# EAGLE board MP2636-Single-Cell-BMS (EAGLE 9.6.2)

Size 75.93 x 70.2 mm. Coordinates in mm from the lower left corner, seen from the top.
Outline: 0,0.19 75.92,0 75.92,70.01 0,70.2 0,0.19
Copper layers (1*16): Top 0.035mm / dielectric 1.5mm / Bottom 0.035mm
Design rules "default": minimum track width 6mil, minimum drill 0.35mm, track to track 6mil, track to pad 6mil, pad to pad 6mil, via to via 6mil, smd to smd 6mil, copper to edge 40mil, drill to drill 6mil, minimum pad ring 10mil, minimum via ring 8mil, stop-mask expansion 4mil, vias tented up to drill 0mil, thermal gap 10mil

## Footprints (pad centres in the part's own frame; a part is rotated, then mirrored left to right if it is on the bottom)
CAPC2012X110 = smd 1.165 x 1.465: 1 -0.875,0; 2 0.875,0
1X01 = drill 1.016 octagon: 1 0,0
04C = drill 0.813 pad 1.905 octagon: 1 -1.905,0; 2 1.905,0; 3 5.715,0
IND_LQH5BPN2R2NT0L = smd 1.85 x 4.1: 1 -1.825,0; 2 1.825,0
CHIP-LED0805 = smd 1.2 x 1.2: A 0,-1.05; C 0,1.05
RESC2012X65 = smd 1.031 x 1.42: 1 -0.919,0; 2 0.919,0
IC_MP2636GR-P = smd 1.1 x 0.2: 1 -2.05,1.4; 2 -2.05,1; 3 -2.05,0.6; 4 -2.05,0.2; 5 -2.05,-0.2; 6 -2.05,-0.6; 7 -2.05,-1; 8 -2.05,-1.4; 15 2.05,-1.4; 16 2.05,-1; 17 2.05,-0.6; 18 2.05,-0.2; 19 2.05,0.2; 20 2.05,0.6; 21 2.05,1; 22 2.05,1.4 | smd 0.2 x 1.1: 9 -1,-2.05; 10 -0.6,-2.05; 11 -0.2,-2.05; 12 0.2,-2.05; 13 0.6,-2.05; 14 1,-2.05; 23 1,2.05; 24 0.6,2.05; 25 0.2,2.05; 26 -0.2,2.05; 27 -0.6,2.05; 28 -1,2.05 | smd 1.8 x 0.3: 29 0,0.6; 30 0,0

## Placement (x,y rotation side)
C1  1uf  [CAPC2012X110]  33.33,33.56 0 top
C2  1uf  [CAPC2012X110]  33.22,35.79 0 top
C3  22uf  [CAPC2012X110]  36.63,43.05 90 top
C4  100nf  [CAPC2012X110]  33.4,31.33 180 top
C5  1uf  [CAPC2012X110]  45.69,31.82 180 top
C6  1uf  [CAPC2012X110]  45.65,34.13 180 top
C7  22uf  [CAPC2012X110]  34.43,40.57 180 top
C8  [CAPC2012X110]  40.83,15.37 180 top
C9  NC  [CAPC2012X110]  15.37,53.55 0 top
CBATT  22uf  [CAPC2012X110]  55.18,44.51 90 top
CIN  22uf  [CAPC2012X110]  30.23,34.66 270 top
CSYS  22uf  [CAPC2012X110]  34.41,38.25 180 top
CTMR  100nf  [CAPC2012X110]  34.77,23.9 270 top
F  SYS  [1X01]  24.13,37.02 0 top
JP1  [04C]  37.17,57.09 90 top
JP2  [04C]  41.28,57.13 90 top
JP3  [04C]  55.94,17.42 180 top
JP4  VIN  [1X01]  24.13,31.94 0 top
JP5  [04C]  52.07,12.89 0 top
JP6  PGND  [1X01]  68.08,50.39 0 top
JP7  PWIN  [1X01]  68.57,31.36 0 top
JP8  VCC  [1X01]  25.4,9.08 0 top
JP9  VIN  [1X01]  10.16,33.21 0 top
JP10  AGND  [1X01]  40.64,9.08 0 top
JP11  SYS  [1X01]  10.16,48.45 0 top
JP12  IB  [1X01]  10.54,56.6 0 top
JP13  BATT  [1X01]  41.3,45.87 0 top
JP14  BATT  [1X01]  68.08,56.74 0 top
JP15  NTC  [1X01]  30.48,9.08 0 top
JP16  SW  [1X01]  68.34,37.76 0 top
JP17  PGND  [1X01]  10.16,40.83 0 top
JP18  SYS  [1X01]  35.56,9.08 0 top
L1  1.5uH  [IND_LQH5BPN2R2NT0L]  47.39,39.54 90 top
LED1  [CHIP-LED0805]  38.09,14.66 0 top
LED2  [CHIP-LED0805]  53.64,57.67 180 top
LED3  [CHIP-LED0805]  51.24,57.73 180 top
R1  31.6K  [RESC2012X65]  40.79,17.61 180 top
R2  10K  [RESC2012X65]  40.79,19.89 0 top
R3  23.7K 1%  [RESC2012X65]  30.07,22.35 270 top
R4  5.1K  [RESC2012X65]  31.73,25.92 0 top
R5  10K  [RESC2012X65]  37.17,66.12 270 top
R6  10K  [RESC2012X65]  41.24,66.15 270 top
R7  10K  [RESC2012X65]  48.06,15 90 top
R9  2K  [RESC2012X65]  40.75,13.05 0 top
R10  2K  [RESC2012X65]  53.61,61.43 90 top
R11  2K  [RESC2012X65]  51.22,61.45 90 top
R12  1K  [RESC2012X65]  11.73,53.59 0 top
R21  0  [RESC2012X65]  64.99,17.4 180 top
RH  15K 1%  [RESC2012X65]  32.28,22.35 270 top
RILIM  13.3K  [RESC2012X65]  31.75,28.13 0 top
RISET  47.5K  [RESC2012X65]  43.18,27.17 180 top
RL  5.1K  [RESC2012X65]  36.92,23.88 270 top
ROLIM  37.4K 1%  [RESC2012X65]  43.18,29.4 180 top
RS1  20m  [RESC2012X65]  51.49,44.5 90 top
RT  10K  [RESC2012X65]  39.1,23.9 270 top
RT1  10K  [RESC2012X65]  43.21,22.7 0 top
RT2  10K  [RESC2012X65]  43.2,24.93 180 top
U1  MP2636GR-P  [IC_MP2636GR-P]  38.1,34.48 0 top

## Library data of the parts
C1-C9 CBATT CIN CSYS CTMR = Capacitor; CATEGORY: Capacitor
F JP4 JP6-JP18 = Connector; CATEGORY: CONNECTOR; SUB-CATEGORY: PIN-HEADER
JP1-JP3 JP5 = jumper
L1 = LQH5BPN2R2NT0L; AVAILABILITY: Unavailable; DESCRIPTION: Inductor with Inductance: 2.2uH Tol. +/-30%, Package: 2020 (5050); MF: Murata; MP: LQH5BPN2R2NT0L; PACKAGE: NONSTANDARD; PRICE: None
LED1-LED3 = led
R1-R7 R9-R12 R21 RH RILIM RISET RL ROLIM RS1 RT RT1 RT2 = Resistor; CATEGORY: Resistor; SUB-CATEGORY: Fixed
U1 = MP2636GR-P; AVAILABILITY: Warning; DESCRIPTION: Charger IC Lithium Ion/Polymer 30-QFN (4x4); MF: Monolithic Power; MP: MP2636GR-P; PACKAGE: QFN-30 Monolithic Power; PRICE: None; PURCHASE-URL: https://pricing.snapeda.com/search/part/MP2636GR-P/?ref=eda

## Nets
AGND: CTMR.2 JP1.1 JP2.1 JP3.1 JP10.1 R2.2 R4.1 R21.2 RILIM.1 RISET.1 RL.1 ROLIM.1 RT2.1 U1.15 U1.26
DGND: C1.1 C2.1 C3.1 C4.2 C5.1 C6.1 C7.1 C9.2 CBATT.1 CIN.1 CSYS.1 JP6.1 JP17.1 R21.1 U1.27 U1.28
FB: RT.1 U1.11
HIGH: JP5.2
IB: C9.1 JP12.1 R12.2
N$1: R12.1 U1.1
N$2: JP1.3 R5.2
N$3: JP1.2 U1.25
N$4: JP2.2 U1.24
N$5: JP3.2 U1.16
N$6: JP2.3 R6.2
N$7: JP3.3 R7.2
N$8: RH.1 RL.2 U1.9
N$9: LED1.C U1.10
N$10: C8.2 R1.2 R2.1 RT.2
N$11: LED2.C U1.23
N$12: L1.2 RS1.1 U1.18
N$14: LED3.C U1.22
N$15: LED1.A R9.1
N$16: LED2.A R10.1
N$17: LED3.A R11.1
N$18: R9.2 R10.2 R11.2
N$20: RILIM.2 U1.6
N$21: RISET.2 U1.13
N$22: ROLIM.2 U1.14
N$23: CTMR.1 U1.8
NTC: JP15.1 RT1.1 RT2.2 U1.12
PWIN: JP7.1 R3.1 R4.2 U1.7
SW: JP16.1 L1.1 U1.2 U1.21
SYS: C2.2 C6.2 C7.2 C8.1 CSYS.2 F.1 JP11.1 JP18.1 R1.1 RT1.2 U1.3 U1.20 U1.29
VBATT: C3.2 CBATT.2 JP5.3 JP13.1 JP14.1 RS1.2 U1.17
VCC: C4.1 JP5.1 JP8.1 R5.1 R6.1 R7.1 U1.5
VIN: C1.2 C5.2 CIN.2 JP4.1 JP9.1 R3.2 RH.2 U1.4 U1.19 U1.30

## Tracks (layer width: path | path; a pad name or v marks a point on that pad's centre or on a via)
AGND  (14 unrouted)
DGND  (15 unrouted)
FB  (1 unrouted)
IB  (2 unrouted)
N$1  (1 unrouted)
N$2  (1 unrouted)
N$3  (1 unrouted)
N$4  (1 unrouted)
N$5  (1 unrouted)
N$6  (1 unrouted)
N$7  (1 unrouted)
N$8  (2 unrouted)
N$9  (1 unrouted)
N$10  (3 unrouted)
N$11  (1 unrouted)
N$12  (2 unrouted)
N$14  (1 unrouted)
N$15  (1 unrouted)
N$16  (1 unrouted)
N$17  (1 unrouted)
N$18  (2 unrouted)
N$20  (1 unrouted)
N$21  (1 unrouted)
N$22  (1 unrouted)
N$23  (1 unrouted)
NTC  (3 unrouted)
PWIN  (3 unrouted)
SW  (3 unrouted)
SYS  (12 unrouted)
VBATT  (6 unrouted)
VCC  (6 unrouted)
VIN  (9 unrouted)